# Altium PCB PCB.PcbDoc
Units mil, origin at the board's own origin, x right, y up, seen from the top; angles counter-clockwise.
Board outline 2235 x 2815 mil, 2 copper layers (Top Layer, Bottom Layer); 5 components, 8 nets, 40 pads, 0 vias.
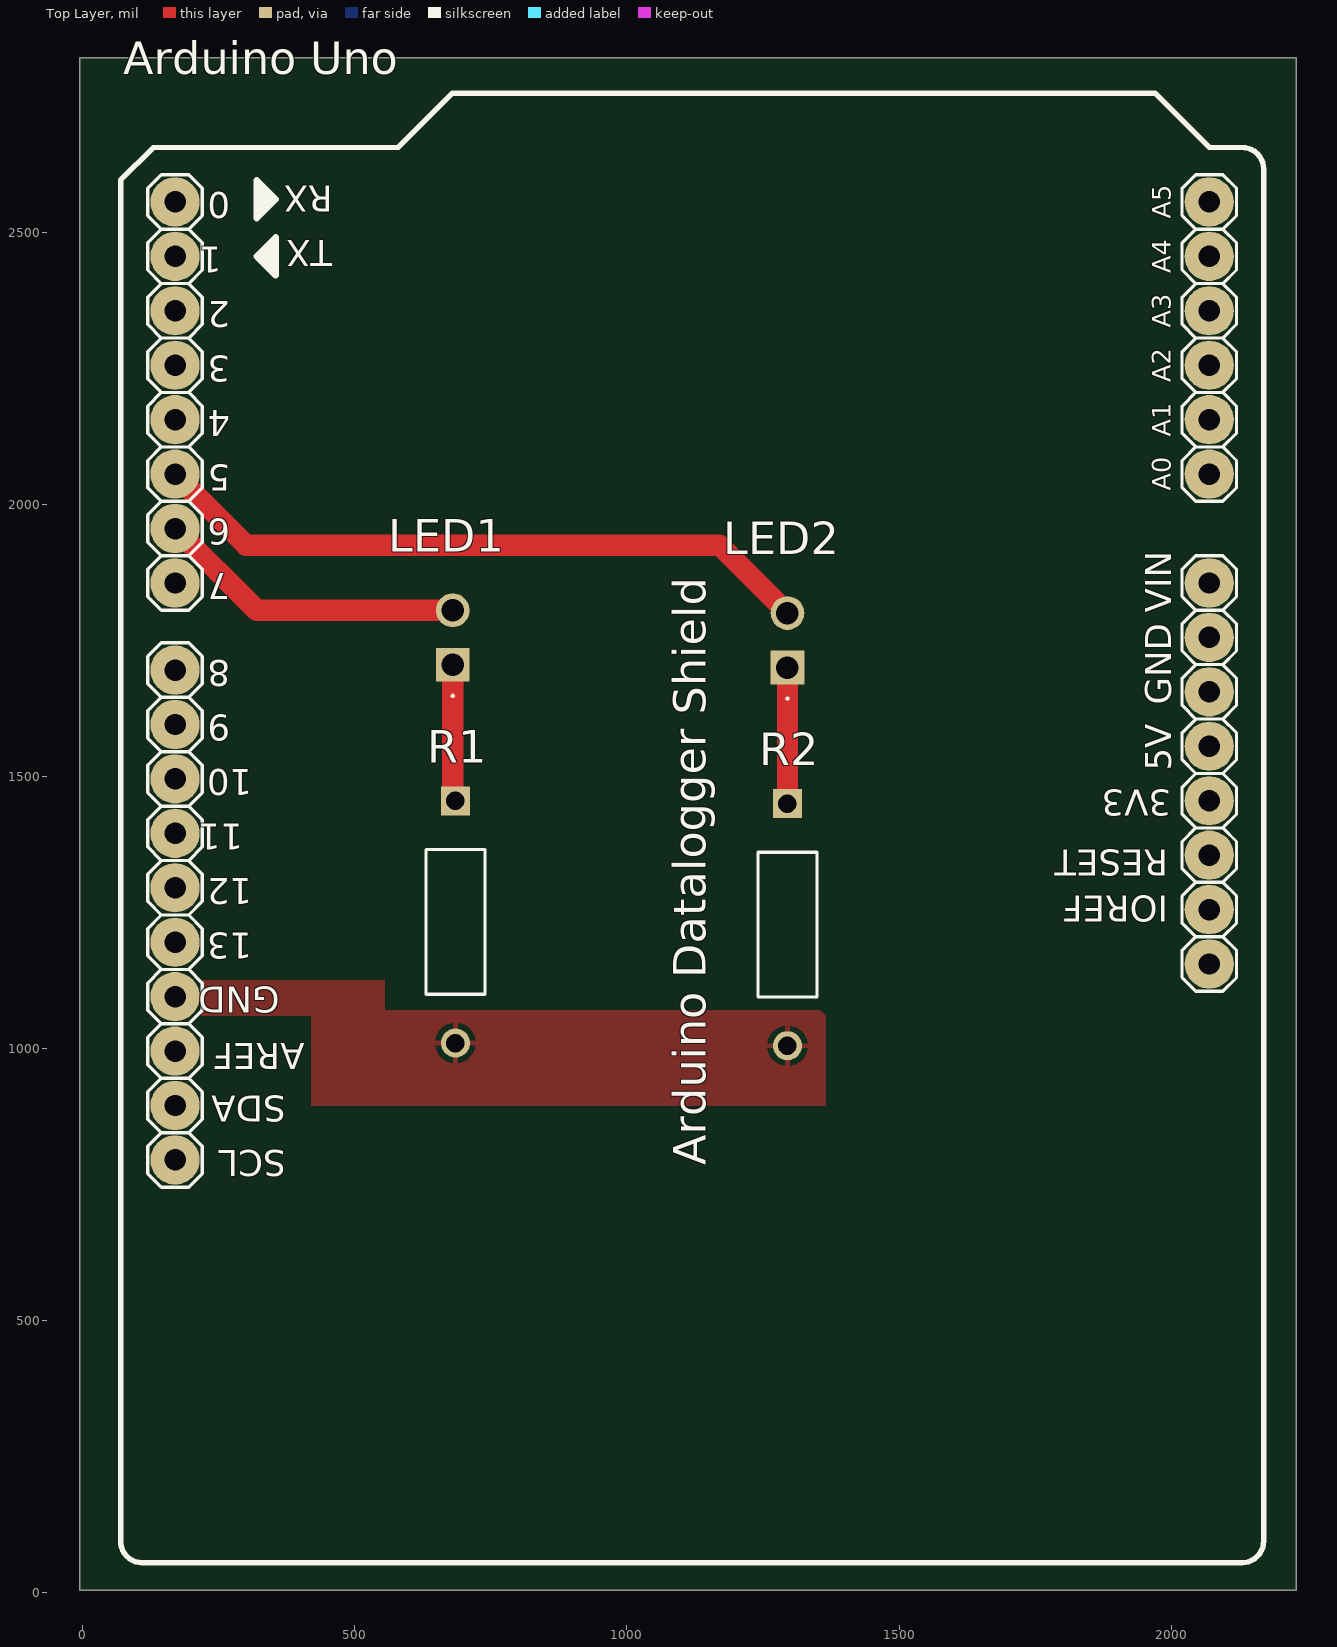
[diagram p0: Top Layer view]
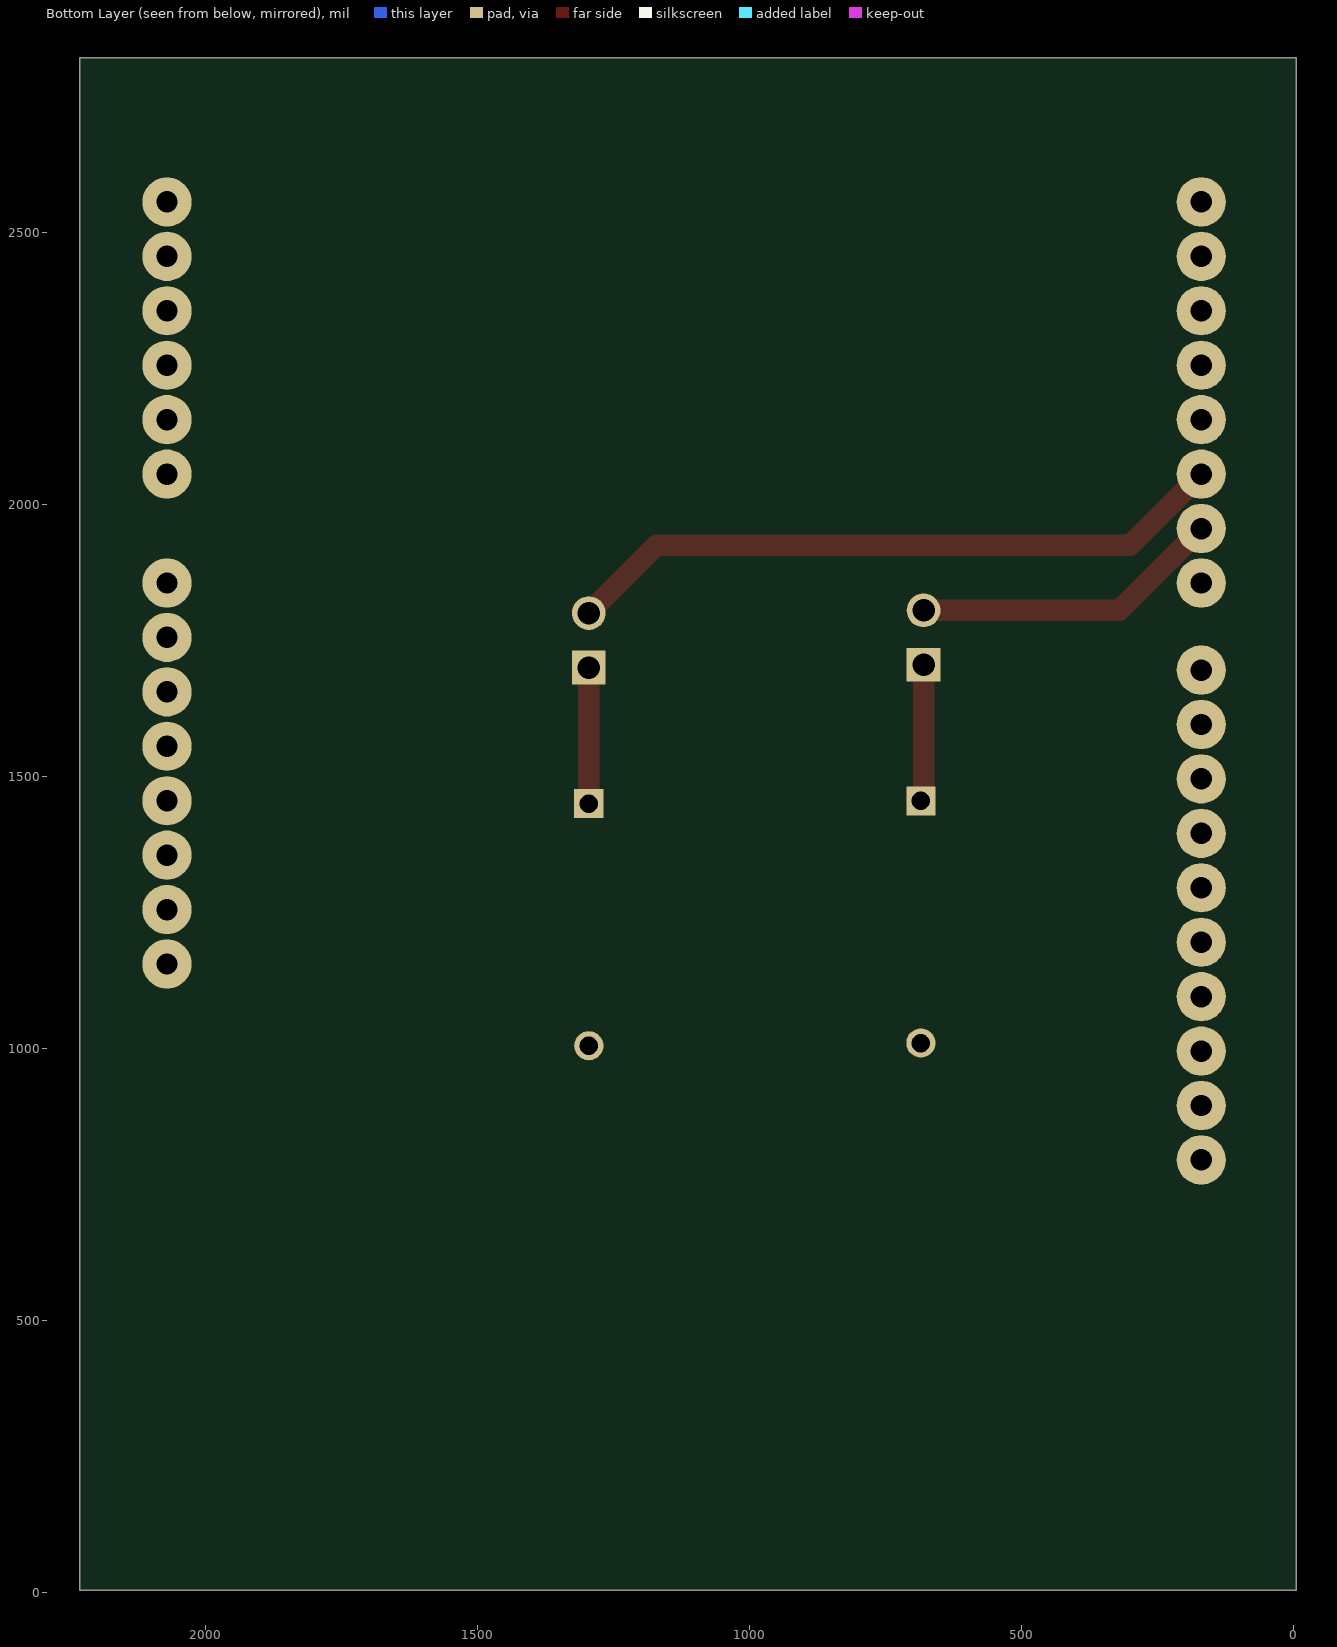
[diagram p1: Bottom Layer view, seen from below]
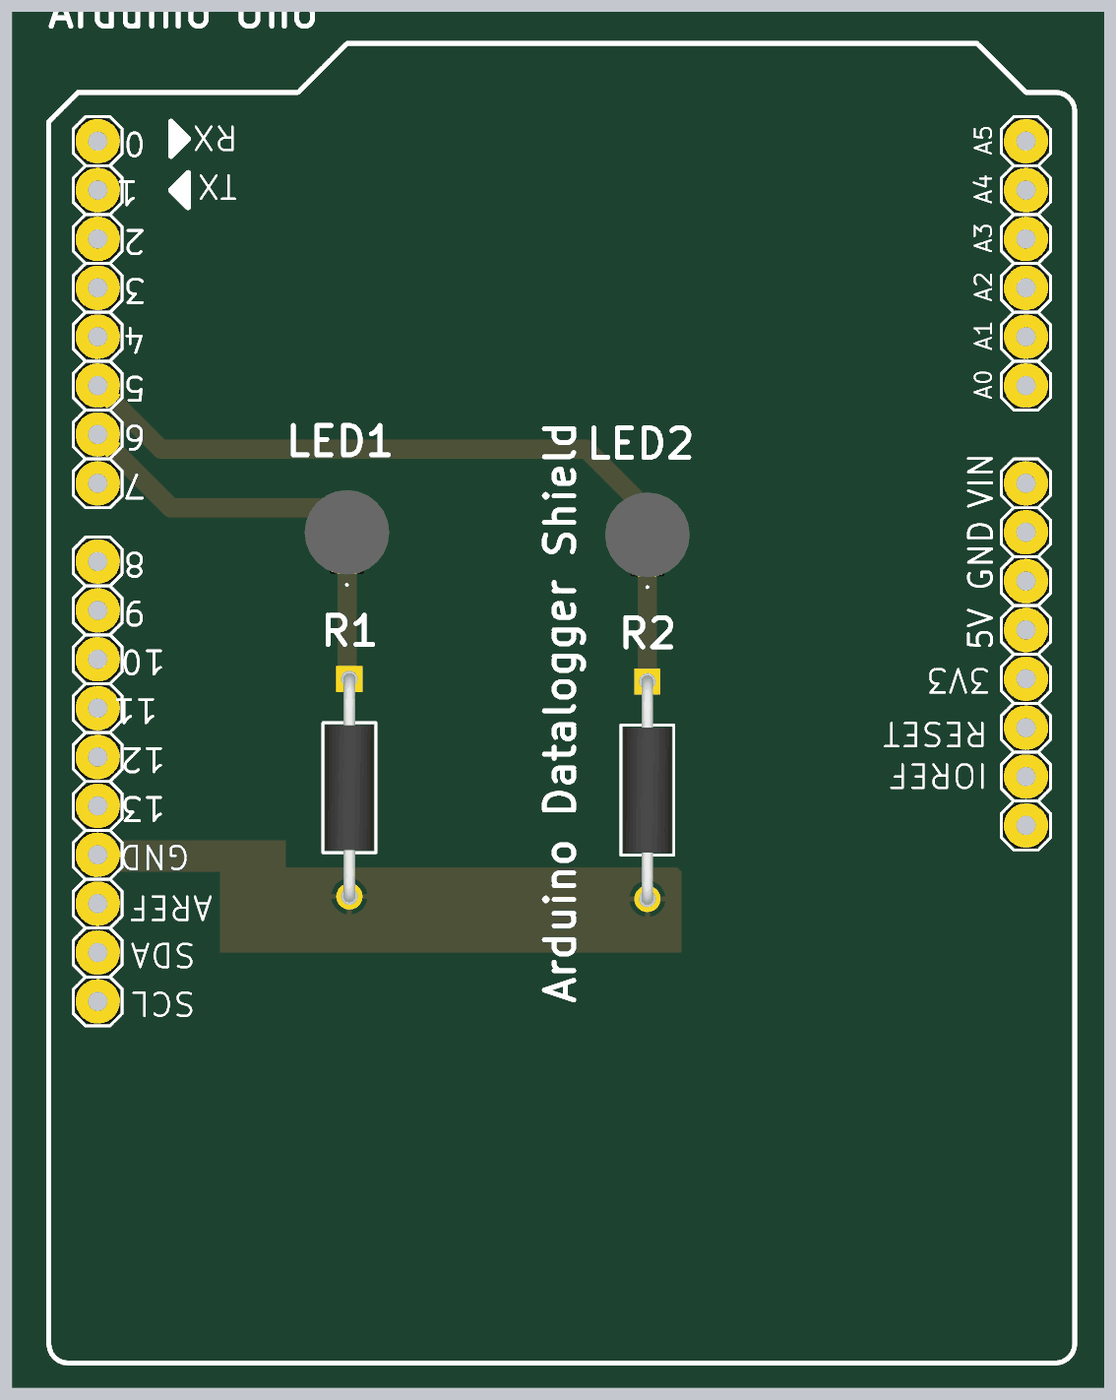
[diagram p2: 3D render of the assembled board from above, using the file's embedded part models]

## Layer stack, top to bottom
Top Solder: solder mask 0.4, Solder Resist, Dk 3.5
Top Layer: signal copper 1.4
Dielectric 1: dielectric 12.6, FR-4, Dk 4.8
Bottom Layer: signal copper 1.4
Bottom Solder: solder mask 0.4, Solder Resist, Dk 3.5

## Board outline
-5,5 2230,5 2230,2820 -5,2820

## Design rules (kind name [scope] priority, off if disabled: settings)
Clearance [All] p1: gap=10 ignorepadtopadclearanceinfootprint=FALSE except(0: Arc-Hole Track-Hole SMDPad-Hole THPad-Hole Via-Hole Fill-Hole Poly-Hole Region-Hole Text-Hole)
PolygonConnect [All] p1: connectstyle=Relief reliefconductorwidth=10 reliefentries=4 polygonreliefangle="90 Angle" airgapwidth=10
RoutingVias [All] p1: holewidth=28 width=50 viastyle="Through Hole" minholewidth=28 minwidth=50 maxholewidth=28 maxwidth=50
SolderMaskExpansion [All] p1: expansion=4 istentingtop=FALSE
Width [All] p1: maxlimit=10 minlimit=10 preferedwidth=10
30 further rules are at their usual default settings.

## Components (designator, comment, footprint, x,y, rotation, side; value= is the part's Value field where it differs from the comment)
"Arduino Uno" "ARDUINO UNO" "Arduino Uno" 1125,1475 r90 top
LED1 "HL3P-BR60-J00DD" HL3PBR60J00DD 680,1705 r180 top
LED2 "HL3P-BR60-J00DD" HL3PBR60J00DD 1295,1700 r180 top
R1 "MRS25000C4751FRP00" MBB_VIS 685,1455 r270 top
R2 "MRS25000C4751FRP00" MBB_VIS 1295,1450 r270 top

## Footprints (in the part's own frame and the unit in brackets; to place one, negate y for a bottom-side part, rotate by r counter-clockwise, add the part's x,y. Pads: shape width x height; smd on the part's side, far side on the other; paste and mask are expansions set on the pad)
"Arduino Uno" [mm]
  round 2.3 hole 1: 0(27.44,24.26) 1(24.9,24.26) 2(22.36,24.26) 3(19.82,24.26) 3.3V(-0.5,-24) 4(17.28,24.26) 5(14.74,24.26) 5V(2.04,-24) 6(12.2,24.26) 7(9.66,24.26) 8(5.596,24.26) 9(3.056,24.26) 10(0.516,24.26) 11(-2.024,24.26) 12(-4.564,24.26) 13(-7.104,24.26) A0(14.74,-24) A1(17.28,-24) A2(19.82,-24) A3(22.36,-24) A4(24.9,-24) A5(27.44,-24) AREF(-12.184,24.26) GND1(7.12,-24) GND2(4.58,-24) GND3(-9.644,24.26) IOREF(-5.58,-24) NC(-8.12,-24) RST(-3.04,-24) SCL(-17.264,24.26) SDA(-14.724,24.26) Vin(9.66,-24)
  silkscreen extent -36.06,-26.54 32.52,26.8
HL3PBR60J00DD [mm]
  rect 1.575x1.575 hole 1.05: 1(0,0)
  round 1.575 hole 1.05: 2(0,-2.54)
  silkscreen extent -0.05,1.4 0.05,1.5, body extent -2.19,-3.47 2.19,0.93, height 7
MBB_VIS [mil]
  rect 53.62x53.62 / inner round 60 / far side rect 53.62x53.62 hole 34 paste-26.81 mask+0: 1(0,0)
  round 53.62 / inner round 60 / far side round 53.62 hole 34 paste-26.81 mask+0: 2(444.88,0)
  silkscreen extent 89,-54 355,54, body extent -12,-49 457,49, height 98

## Part data
LED1 LED2: "LED", Manufacturer_Name="Avago Technologies", Datasheet Link=https://docs.broadcom.com/doc/HL3P-Nx45-Bx60-DS102, Height=6.9mm, Manufacturer_Part_Number=HL3P-BR60-J00DD
R1 R2: "No Description Available", Mfr_Name=Vishay, Copyright="Copyright (C) 2023 Ultra Librarian. All rights reserved.", Manufacturer_Part_Number=MRS25000C4751FRP00, RefDes=RefDes, Type=DEV

## Nets (pads, with @x,y where several pads share a name; then routed paths per layer and width w, separated by ;. In a path a pad name is that pad's centre, name@x,y a point inside that pad or via, vN(x,y) a via of type N, cw(c..) or ccw(c..) an arc to the next point about the centre after c; other vN are vias at no path point)
GND: "Arduino Uno.GND3" R1.2 R2.2
"NetArduino Uno_5": "Arduino Uno.5" LED2.2 | length 1230.9
  Top Layer w39.37: 169.88,2055.32 300.27,1924.93 1170.07,1924.93 LED2.2
"NetArduino Uno_6": "Arduino Uno.6" LED1.2 | length 572.4
  Top Layer w39.37: 169.88,1955.32 320.2,1805 LED1.2
"NetArduino Uno_SCL": "Arduino Uno.SCL"
"NetArduino Uno_SDA": "Arduino Uno.SDA"
NetLED1_1: LED1.1 R1.1 | length 252.1
  Top Layer w10: R1.1@680,1460 R1.1
  Top Layer w39.37: R1.1@680,1460 LED1.1
NetLED2_1: LED2.1 R2.1 | length 250
  Top Layer w39.37: R2.1 LED2.1
VCC: "Arduino Uno.5V"
pads on no net: "Arduino Uno.0" "Arduino Uno.1" "Arduino Uno.2" "Arduino Uno.3" "Arduino Uno.3.3V" "Arduino Uno.4" "Arduino Uno.7" "Arduino Uno.8" "Arduino Uno.9" "Arduino Uno.10" "Arduino Uno.11" "Arduino Uno.12" "Arduino Uno.13" "Arduino Uno.A0" "Arduino Uno.A1" "Arduino Uno.A2" "Arduino Uno.A3" "Arduino Uno.A4" "Arduino Uno.A5" "Arduino Uno.AREF" "Arduino Uno.GND1" "Arduino Uno.GND2" "Arduino Uno.IOREF" "Arduino Uno.NC" "Arduino Uno.RST" "Arduino Uno.Vin"

## Polygon pours and split planes (outlines as drawn)
GND on Top Layer "GND_L01_P001" (solid, pour order 1): 115,1125 115,1060 420,1060 420,895 1365,895 1365,1060 1355,1070 555,1070 555,1125

## Text inside footprints (layer, text, board x,y; h text height)
"Arduino Uno": Top Overlay "5V" at 1999.88,1510.32 h47.6 r90; Top Overlay "A0" at 1998.88,2024.32 h34 r90; Top Overlay "AREF" at 408.36,1009.9 h47.6 r180; Top Overlay "GND" at 361.77,1113.9 h47.6 r180; Top Overlay "RESET" at 1994.88,1365.32 h47.6 r180; Top Overlay "3V3" at 1999.88,1475.32 h47.6 r180; Top Overlay "A1" at 1998.88,2124.32 h34 r90; Top Overlay "A2" at 1998.88,2224.32 h34 r90; Top Overlay "A3" at 1998.88,2324.31 h34 r90; Top Overlay "A4" at 1998.88,2424.31 h34 r90; Top Overlay "A5" at 1998.88,2524.31 h34 r90; Top Overlay "VIN" at 1999.88,1800.32 h47.6 r90; Top Overlay "GND" at 1999.88,1631.32 h47.6 r90; Top Overlay "IOREF" at 1994.88,1280.32 h47.6 r180; Top Overlay "TX" at 458.88,2485.31 h47.6 r180; Top Overlay "RX" at 459.88,2585.31 h47.6 r180; Top Overlay "13" at 311.26,1212.9 h47.6 r180; Top Overlay "12" at 311.26,1312.9 h47.6 r180; Top Overlay "11" at 295.4,1412.9 h47.6 r180; Top Overlay "10" at 311.26,1512.9 h47.6 r180; Top Overlay "9" at 271.61,1612.9 h47.6 r180; Top Overlay "8" at 271.61,1712.9 h47.6 r180; Top Overlay "7" at 271.61,1872.9 h47.6 r180; Top Overlay "6" at 271.61,1972.9 h47.6 r180; Top Overlay "5" at 271.61,2072.9 h47.6 r180; Top Overlay "4" at 271.61,2172.9 h47.6 r180; Top Overlay "3" at 271.61,2272.9 h47.6 r180; Top Overlay "2" at 271.61,2372.9 h47.6 r180; Top Overlay "1" at 255.74,2472.9 h47.6 r180; Top Overlay "0" at 271.61,2572.9 h47.6 r180; Top Overlay "SCL" at 373.03,813.58 h47.6 r180; Top Overlay "SDA" at 373.54,913.13 h47.6 r180; Top Overlay "Arduino Datalogger Shield" at 1144.69,786.02 h60 r90